# Altium PCB ARS_CR_LedStripModule_Rev1B.PcbDoc
Units mm, origin at the board's own origin, x right, y up, seen from the top; angles counter-clockwise.
Board outline 55 x 70 mm, 4 copper layers (Top Layer, Int1 (GND), Int2 (PWR), Bottom Layer), stack 1.369 mm thick; 65 components, 42 nets, 227 pads, 109 vias.
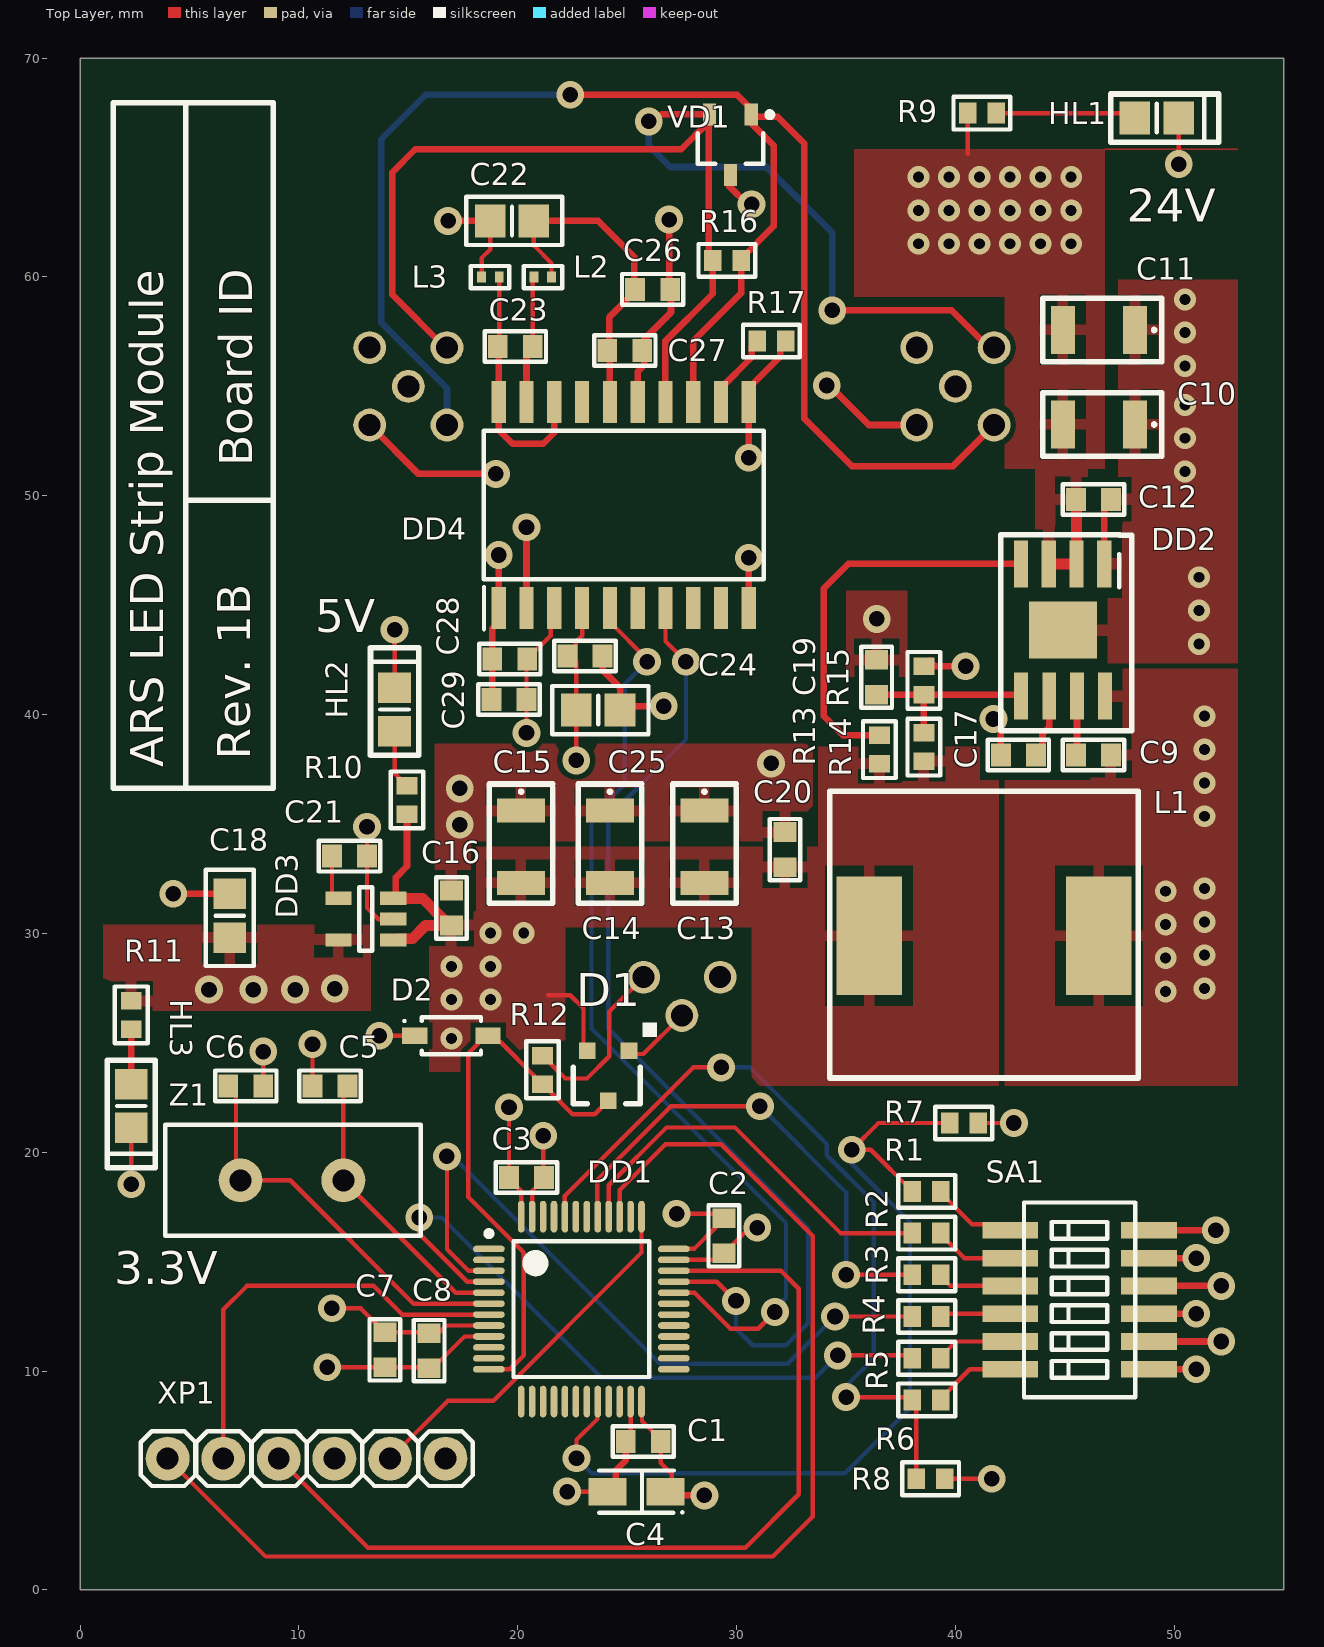
[diagram p0: Top Layer view]
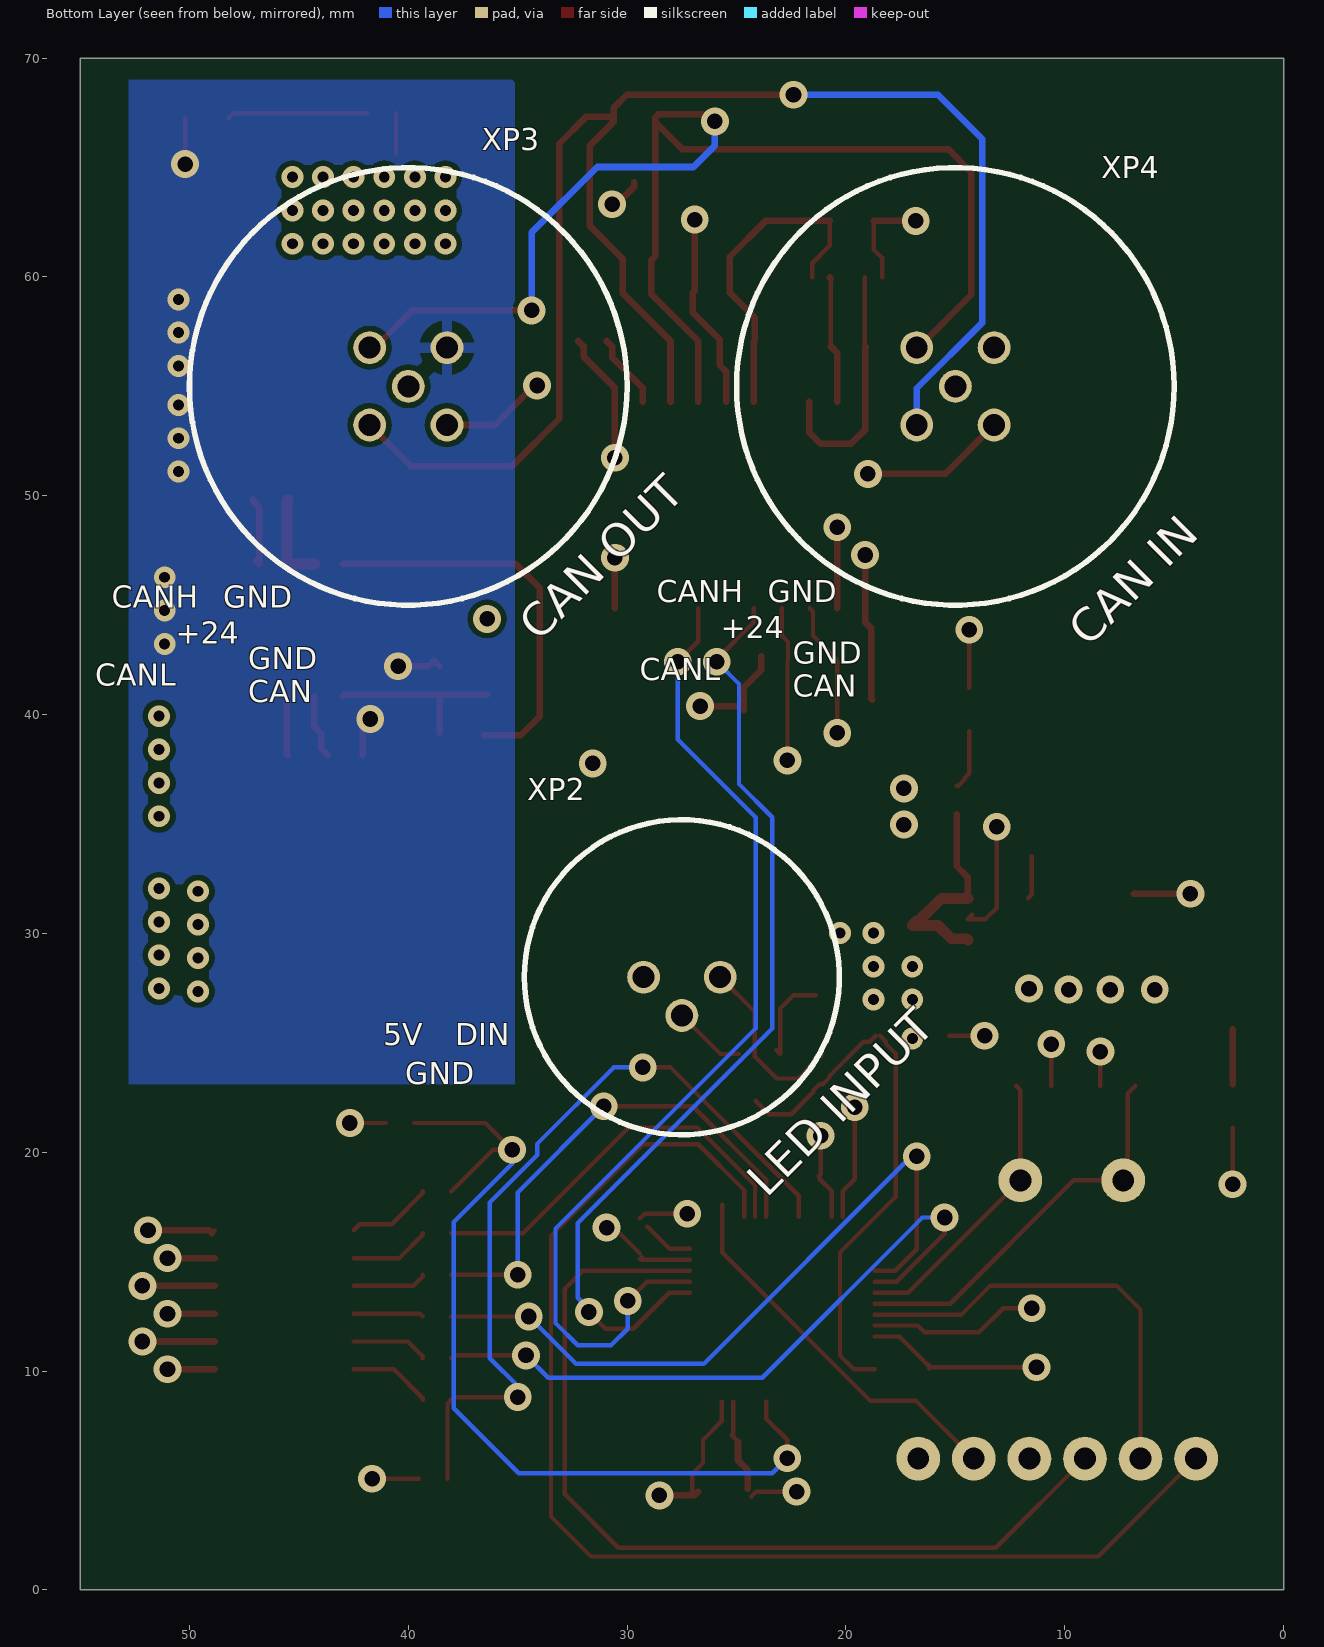
[diagram p1: Bottom Layer view, seen from below]
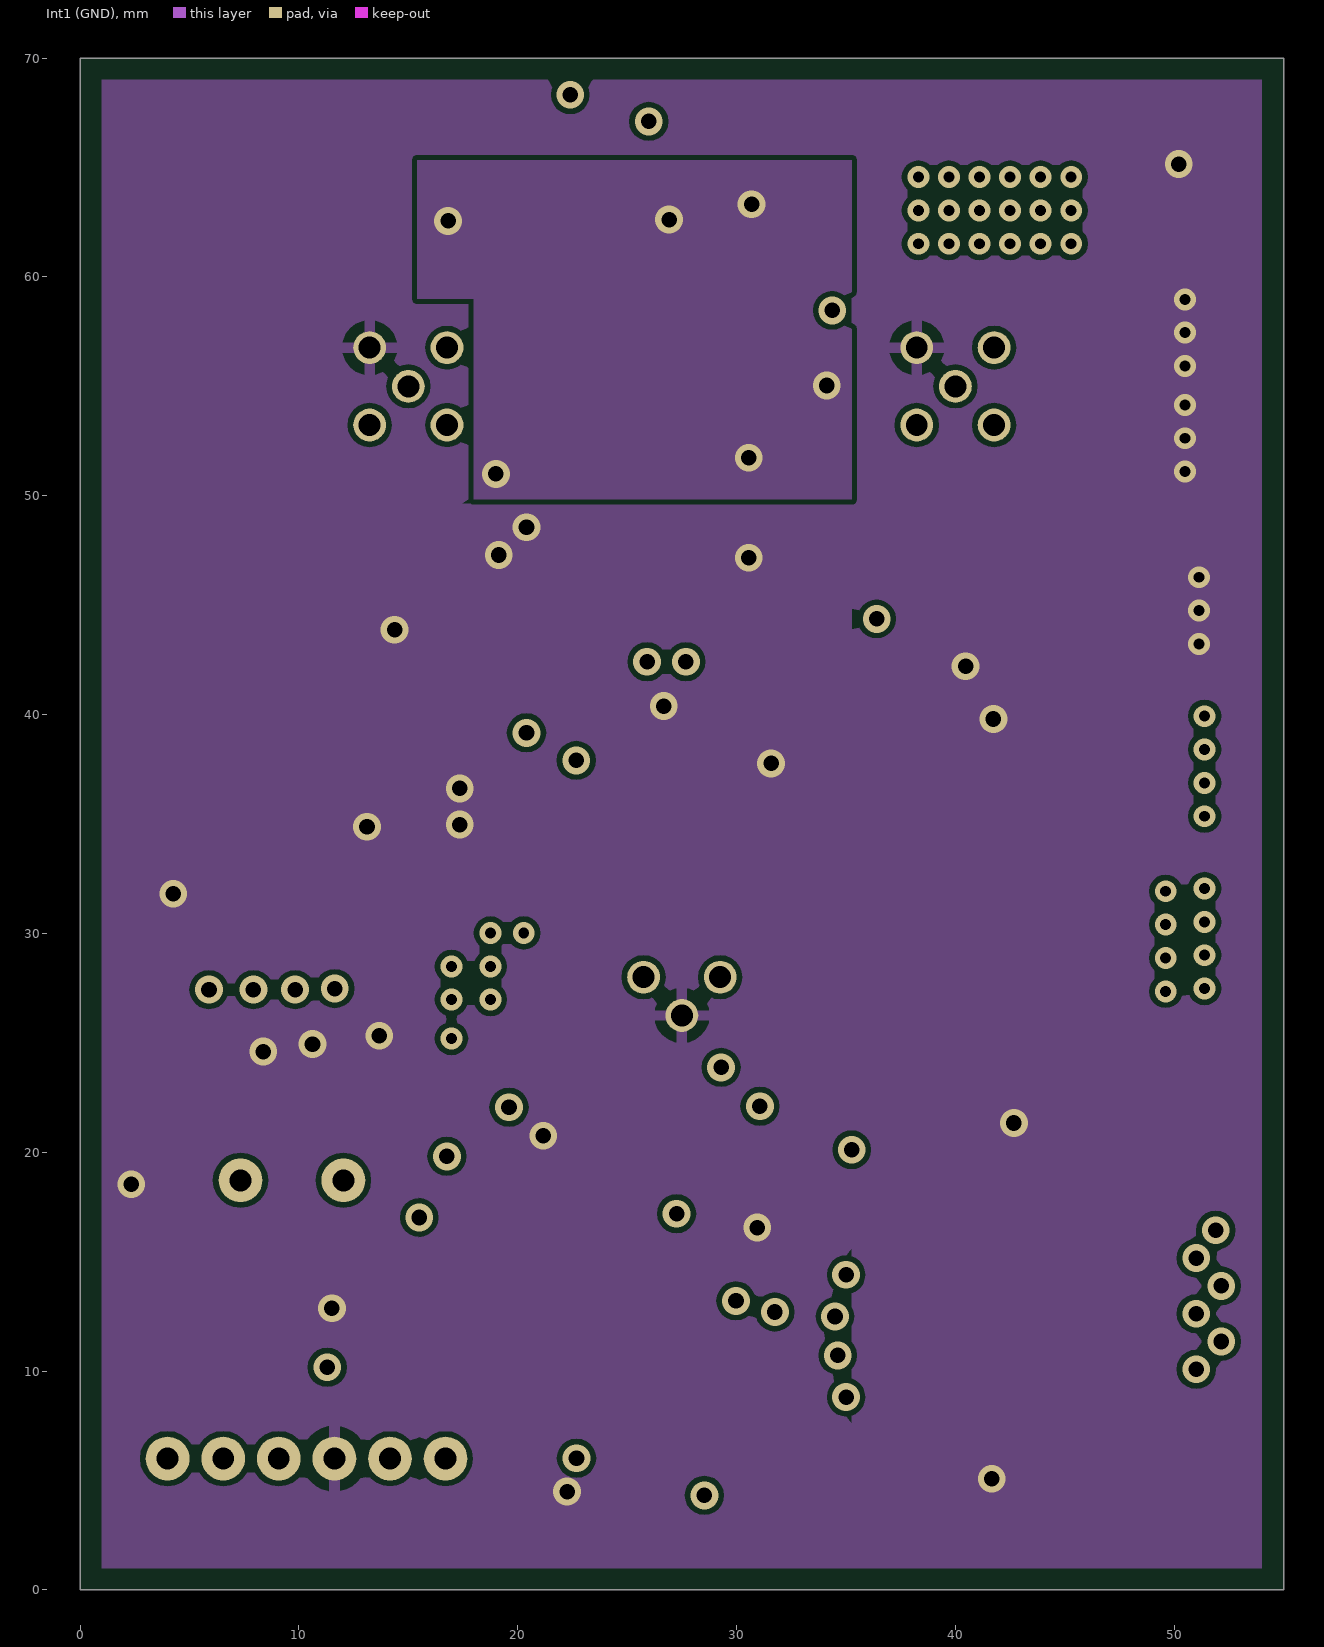
[diagram p2: Int1 (GND)]
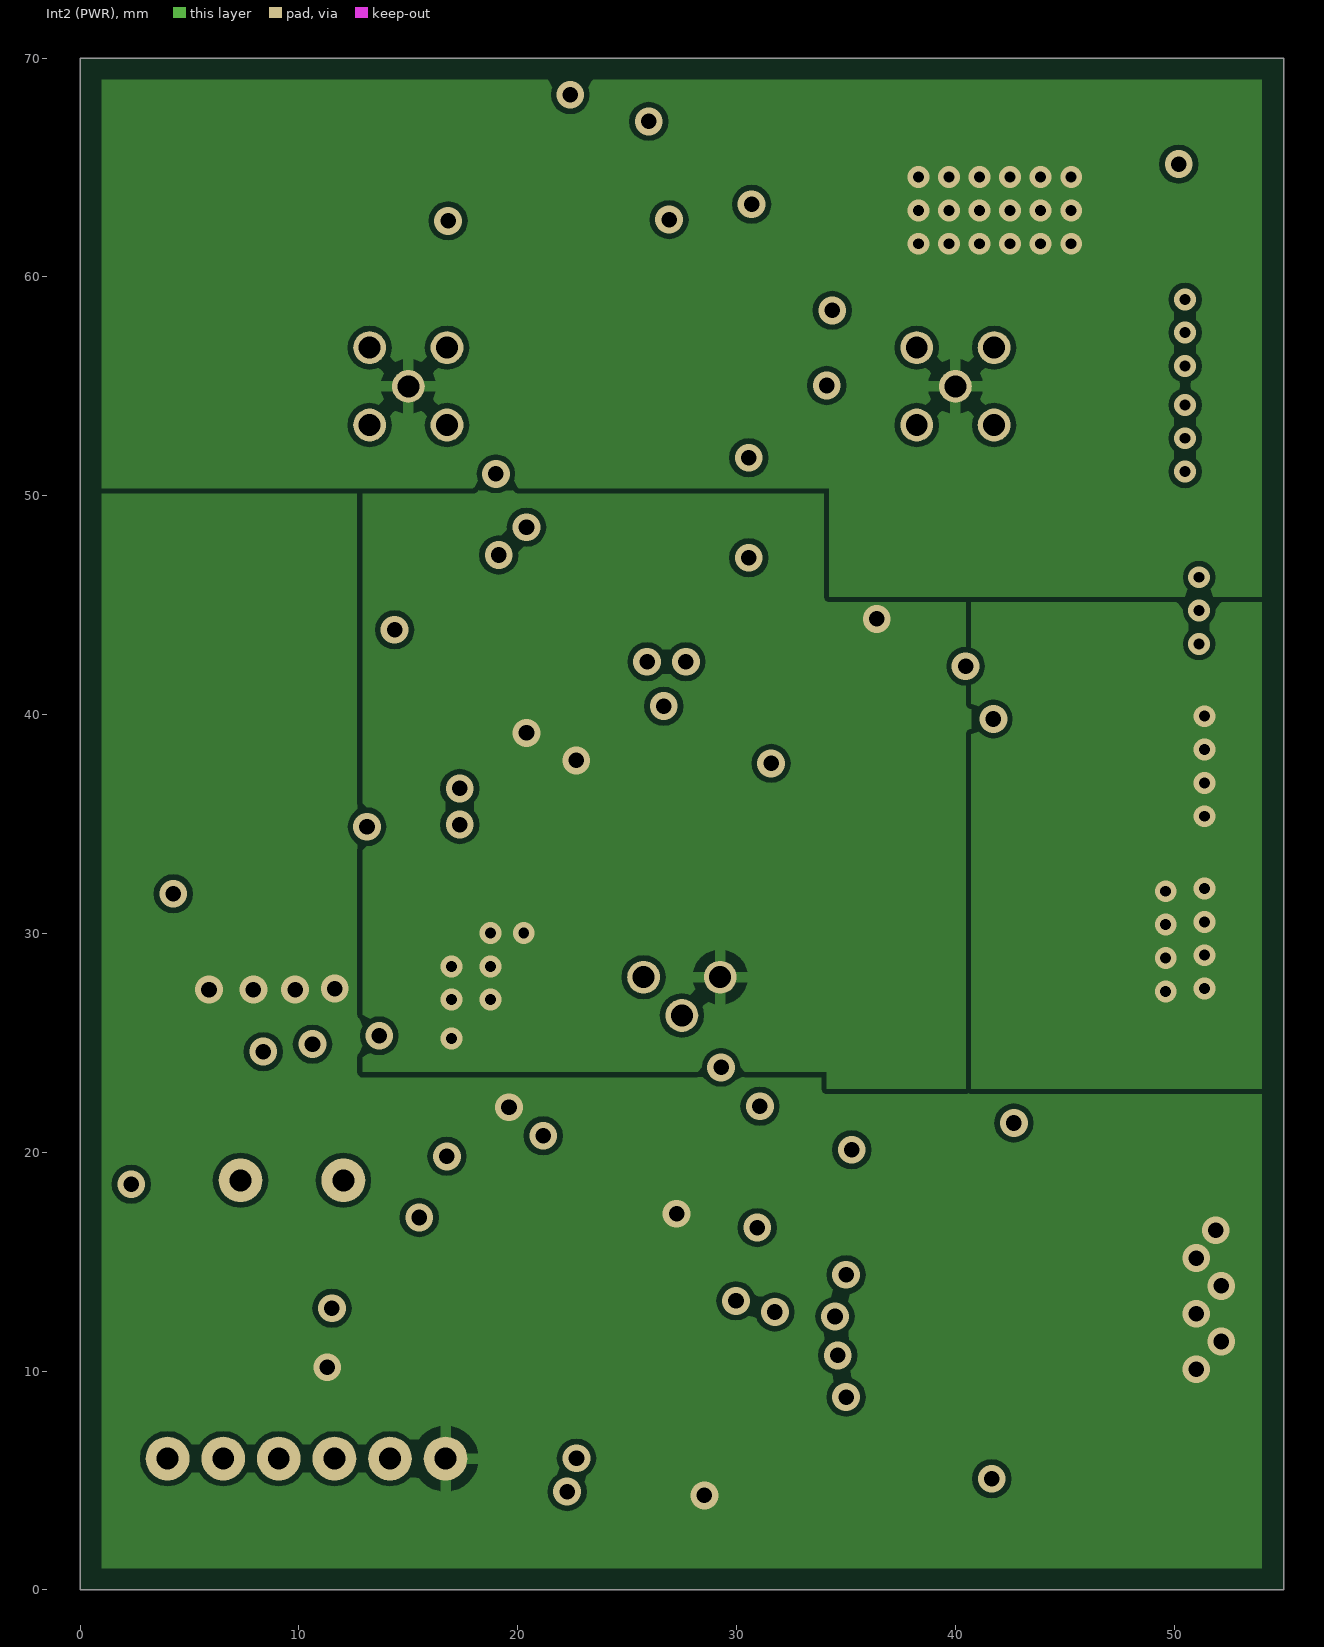
[diagram p3: Int2 (PWR)]

## Layer stack, top to bottom
Top Solder: solder mask 0.0254, SM-001, Dk 4
Top Layer: signal copper 0.035
Dielectric 1: prepreg 0.1295, PP-017, Dk 4.3
Dielectric 2: prepreg 0.1295, PP-017, Dk 4.3
Int1 (GND): signal copper 0.035
Dielectric 3: core 0.7112, Core-039, Dk 4.8
Int2 (PWR): signal copper 0.035
Dielectric 4: prepreg 0.1295, PP-017, Dk 4.3
Dielectric 5: prepreg 0.1295, PP-017, Dk 4.3
Bottom Layer: signal copper 0.035
Bottom Solder: solder mask 0.0254, SM-001, Dk 4

## Board outline
0,0 0,70 55,70 55,0

## Design rules (kind name [scope] priority, off if disabled: settings)
AssemblyTestpoint [All] p1: testpointundercomponent=TRUE minsize=1.016 maxsize=2.54 preferedsize=1.524 minholesize=0 maxholesize=1.016 preferedholesize=0.813 testpointgrid=0.025 usegrid=TRUE gridtolerance=0
Clearance Clearance_vias [IsVia vs IsVia] p1: gap=0.2 ignorepadtopadclearanceinfootprint=FALSE
Clearance Clearance_non_plated [All vs (HoleDiameter > 0) And (PadIsPlated = 'False')] p2: gap=0.275 ignorepadtopadclearanceinfootprint=FALSE
Clearance [All] p3: gap=0.2 ignorepadtopadclearanceinfootprint=FALSE except(0.25: Arc-Fill Arc-Poly Arc-Region Track-Fill Track-Poly Track-Region SMDPad-Fill SMDPad-Poly SMDPad-Region THPad-Fill THPad-Poly THPad-Region Via-Fill Via-Poly Via-Region Fill-Fill Fill-Poly Fill-Region Poly-Poly Poly-Region Region-Region)
DiffPairsRouting [All] p1: maxlimit=0.3 minlimit=0.2 mostfreqgap=0.25 toplayer_minwidth=0.2 toplayer_maxwidth=1 toplayer_prefwidth=0.25 midlayer1_minwidth=0.2 midlayer1_maxwidth=1 midlayer1_prefwidth=0.25 midlayer2_minwidth=0.2 midlayer2_maxwidth=1 midlayer2_prefwidth=0.25 bottomlayer_minwidth=0.2 bottomlayer_maxwidth=1 bottomlayer_prefwidth=0.25 maxuncoupledlength=12.7
HoleSize [All] p1: absolutevalues=TRUE maxlimit=7 minlimit=0.5 maxpercent=80.000 minpercent=20.000
MinimumAnnularRing [All] p1: minimumring=0.25
NetAntennae .VvAkaF7oee6ctAcTlM4a4T.kGzK.duQ9Ug6WwFj&{c6Uxp.fI()n,r0~ [All] p1: netantennaetolerance=0
PolygonConnect PolygonConnectVIA [IsVia] p1: connectstyle=Direct reliefconductorwidth=0.254 reliefentries=4 polygonreliefangle="90 Angle" airgapwidth=0.254
PolygonConnect PolygonConnectPAD [All] p2: connectstyle=Relief reliefconductorwidth=0.5 reliefentries=4 polygonreliefangle="90 Angle" airgapwidth=0.5
RoutingVias [All] p1: holewidth=0.5 width=1 viastyle="Through Hole" minholewidth=0.5 minwidth=1 maxholewidth=3 maxwidth=4
SilkToSilkClearance [All] p1: silktosilkclearance=0.25
SolderMaskExpansion SolderMaskExpansion_non_plated [(HoleDiameter > 0) And (PadIsPlated = 'False')] p1: expansion=0.05 istentingtop=FALSE soldermaskfromhole=TRUE
SolderMaskExpansion SolderMaskExpansion_VIAs [IsVia] p2: expansion=0.25 istentingtop=TRUE soldermaskfromhole=TRUE
SolderMaskExpansion [All] p3: expansion=0.05 istentingtop=FALSE
UnRoutedNet [All] p1: checkbadconnections=TRUE
UnpouredPolygon 2.?a7K2MMp}0~ [All] p1:
Width signal [All] p1: maxlimit=5 minlimit=0.2 preferedwidth=0.3
23 further rules are at their usual default settings.

## Classes and differential pairs
component class U_sub_can: C22 C23 C24 C25 C26 C27 C28 C29 DD4 L2 L3 R16 R17 VD1 XP3 XP4
component class ARS_CR_LedStripModule_Rev1B: C1 C2 C3 C4 C5 C6 C7 C8 C9 C10 C11 C12 C13 C14 C15 C16 C17 C18 C19 C20 C21 D1 D2 DD1 DD2 DD3 HL1 HL2 HL3 L1 R1 R2 R3 R4 R5 R6 R7 R8 R9 R10 R11 R12 R13 R14 R15 SA1 XP1 XP2 Z1

## Components (designator, comment, footprint, x,y, rotation, side; value= is the part's Value field where it differs from the comment)
C1 "Capacitor" 0603C 25.734,6.78 r0 top value=0,1мкФ
C2 "Capacitor" 0603C 29.417,16.178 r90 top value=0,1мкФ
C3 "Capacitor" 0603C 20.4,18.845 r180 top value=0,1мкФ
C4 "1uF" "TC_A (3216)" 25.425,4.494 r180 top value=4,7мкФ
C5 "Capacitor" 0603C 11.421,23.036 r0 top value=16пФ
C6 "Capacitor" 0603C 7.573,23.036 r180 top value=16пФ
C7 "Capacitor" 0603C 13.923,10.971 r270 top value=1мкФ
C8 "Capacitor" 0603C 15.955,10.933 r270 top value=10нФ
C9 "Capacitor" 0603C 46.308,38.149 r180 top value=0,1мкФ
C10 "Capacitor" 1210C 46.563,53.262 r180 top value=10мкФ
C11 "Capacitor" 1210C 46.562,57.58 r180 top value=10мкФ
C12 "Capacitor" 0603C 46.308,49.833 r180 top value=0,22мкФ
C13 "Capacitor" 1210C 28.528,33.958 r270 top value=47мкФ
C14 "Capacitor" 1210C 24.21,33.958 r270 top value=47мкФ
C15 "Capacitor" 1210C 20.146,33.958 r270 top value=47мкФ
C16 "Capacitor" 0603C 16.971,31.164 r270 top value=0,1мкФ
C17 "Capacitor" 0603C 42.879,38.149 r0 top value=1мкФ
C18 "Capacitor" 0805C 6.938,30.91 r270 top value=10мкФ
C19 "Capacitor" 0603C 36.402,41.705 r90 top value=8,2пФ
C20 "Capacitor" 0603C 32.211,33.831 r270 top value=0,1мкФ
C21 "Capacitor" 0603C 12.31,33.528 r180 top value=10нФ
C22 "Capacitor" 0805C 19.638,62.66 r0 top value=10мкФ
C23 "Capacitor" 0603C 19.892,56.818 r0 top value=0,22мкФ
C24 "Capacitor" 0603C 23.076,42.672 r0 top value=0,1мкФ
C25 "Capacitor" 0805C 23.575,40.308 r0 top value=10мкФ
C26 "Capacitor" 0603C 26.162,59.436 r180 top value=0,1мкФ
C27 "Capacitor" 0603C 24.892,56.642 r180 top value=10нФ
C28 "Capacitor" 0603C 19.638,42.542 r0 top value=10нФ
C29 "Capacitor" 0603C 19.6,40.689 r0 top value=0,1мкФ
D1 "NUP1301, 215" SOT23 25.082,24.638 r270 top
D2 "Zener_Diode" SOD-123FL 16.971,25.322 r0 top value=MMSZ5231B
DD1 "STM32F103C8T6" LQFP48 22.906,12.832 r0 top
DD2 "LMR33640ADDAR" SOIC-9N 44.911,43.864 r270 top value="3,8... 36В"
DD3 "TPS73633DBVT" SOT23-5L 13.056,30.656 r180 top value=5В
DD4 "ADM3057EBRWZ" SOIC-20N 24.845,49.579 r90 top
HL1 "SMD Желтый" 0805D 49.102,67.359 r0 top
HL2 "SMD Зеленый" 0805D 14.272,40.132 r90 top
HL3 "SMD Синий" 0805D 2.434,22.214 r270 top
L1 "Inductance" induct_12,3x12,3x8 41.355,29.894 r180 top value=15мкГн
L2 "Inductance" 0402 21.143,59.993 r180 top value=Феррит
L3 "Inductance" 0402 18.749,59.993 r0 top value=Феррит
R1 "Resistor" 0603R 38.688,18.21 r0 top value=150Ом
R2 "Resistor" 0603R 38.688,16.305 r0 top value=150Ом
R3 "Resistor" 0603R 38.688,14.4 r0 top value=150Ом
R4 "Resistor" 0603R 38.688,12.495 r0 top value=150Ом
R5 "Resistor" 0603R 38.688,10.59 r0 top value=150Ом
R6 "Resistor" 0603R 38.688,8.685 r0 top value=150Ом
R7 "Resistor" 0603R 40.386,21.336 r180 top value=1кОм
R8 "Resistor" 0603R 38.862,5.08 r180 top value=1кОм
R9 "Resistor" 0603R 41.213,67.486 r180 top value=10кОм
R10 "Resistor" 0603R 14.939,36.102 r270 top value=1кОм
R11 "Resistor" 0603R 2.334,26.274 r90 top value=1кОм
R12 "Resistor" 0603R 21.13,23.764 r270 top value=1кОм
R13 "Resistor" 0603R 36.529,38.403 r270 top value=100кОм
R14 "Resistor" 0603R 38.561,38.515 r270 top value=100кОм
R15 "Resistor" 0603R 38.561,41.563 r270 top value=24,9кОм
R16 "Resistor" 0603R 29.559,60.755 r180 top value=120Ом
R17 "Resistor" 0603R 31.591,57.072 r180 top value=10кОм
SA1 "DIP_6PIN" SW-6 42.498,16.432 r270 top value=SMD
VD1 "ESDCAN24-2BLY" SOT23-3L 29.718,66.04 r270 top
XP1 "6_PIN_XP" PLS6 16.7,6 r270 top value=PLS-6
XP2 "3_PIN_XP" M8_ACODE_3PIN_FM_STR 27.5,28 r180 bottom value="M8 3PIN ACODE FM STR"
XP3 "5_PIN_XP" M12_ACODE_5PIN_FM_STR 40,55 r180 bottom value="M12 5PIN ACODE FM STR"
XP4 "5_PIN_XP" M12_ACODE_5PIN_FM_STR 15,55 r180 bottom value="M12 5PIN ACODE FM STR"
Z1 "XTAL" HC49US 9.732,18.718 r0 top value=8MHz

## Footprints (in the part's own frame and the unit in brackets; to place one, negate y for a bottom-side part, rotate by r counter-clockwise, add the part's x,y. Pads: shape width x height; smd on the part's side, far side on the other; paste and mask are expansions set on the pad)
0402 [mm]
  rect 0.4x0.5 smd: 1(-0.4,0) 2(0.4,0)
  silkscreen extent -0.89,-0.51 0.86,0.51, body extent -0.56,-0.25 0.56,0.25, height 0.65
0603C [mm] "Chip Resistor, 2-Leads, Body 1,40x0,80mm, IPC Medium Density"
  rect 0.9x1.05 smd: 1(-0.8,0) 2(0.8,0)
  silkscreen extent -1.4,-0.7 1.4,0.7, body extent -0.85,-0.45 0.85,0.45, height 0.9
0603R [mm] "Chip Resistor, 2-Leads, Body 1.60x0.85mm, IPC Medium Density"
  rect 0.8x0.95 smd: 1(-0.65,0) 2(0.65,0)
  silkscreen extent -1.3,-0.75 1.3,0.75, body extent -0.87,-0.47 0.88,0.48, height 0.9
0805C [mm]
  rect 1.4x1.5 smd: 1(-0.9,-0.1) 2(1.1,-0.1)
  silkscreen extent -2,-1.2 2.4,1, body extent -0.95,-0.8 1.15,0.55, height 0.67
0805D [mm]
  rect 1.4x1.5 smd: 1(-0.9,-0.1) 2(1.1,-0.1)
  silkscreen extent -2,-1.2 2.93,1, body extent -0.97,-0.8 1.17,0.6, height 0.7
1210C [mm]
  rect 1.1x2.2 smd: 1(-1.65,0) 2(1.65,0)
  silkscreen extent -2.87,-1.45 2.57,1.46, body extent -1.25,-1.25 1.25,1.25, height 3.2
HC49US [mm]
  round 2 hole 1: 1(-2.4,0) 2(2.3,0)
  silkscreen extent -5.84,-2.54 5.84,2.54, body extent -5.68,-2.25 5.67,2.4, height 3.5
induct_12,3x12,3x8 [mm]
  rect 3x5.4 smd: 1(-5.2,0) 2(5.3,0)
  silkscreen extent -7,-6.6 7.1,6.5, body extent -6,-6 6,6, height 8
LQFP48 [mm] "TSQFP, 48-Leads, Body 7,00x7,00mm, Pitch 0,50mm, IPC Medium Density"
  oval 1.45x0.3 smd: 1(-4.225,2.75) 2(-4.225,2.25) 3(-4.225,1.75) 4(-4.225,1.25) 5(-4.225,0.75) 6(-4.225,0.25) 7(-4.225,-0.25) 8(-4.225,-0.75) 9(-4.225,-1.25) 10(-4.225,-1.75) 11(-4.225,-2.25) 12(-4.225,-2.75) 25(4.225,-2.75) 26(4.225,-2.25) 27(4.225,-1.75) 28(4.225,-1.25) 29(4.225,-0.75) 30(4.225,-0.25) 31(4.225,0.25) 32(4.225,0.75) 33(4.225,1.25) 34(4.225,1.75) 35(4.225,2.25) 36(4.225,2.75)
  oval 0.3x1.45 smd: 13(-2.75,-4.225) 14(-2.25,-4.225) 15(-1.75,-4.225) 16(-1.25,-4.225) 17(-0.75,-4.225) 18(-0.25,-4.225) 19(0.25,-4.225) 20(0.75,-4.225) 21(1.25,-4.225) 22(1.75,-4.225) 23(2.25,-4.225) 24(2.75,-4.225) 37(2.75,4.225) 38(2.25,4.225) 39(1.75,4.225) 40(1.25,4.225) 41(0.75,4.225) 42(0.25,4.225) 43(-0.25,4.225) 44(-0.75,4.225) 45(-1.25,4.225) 46(-1.75,4.225) 47(-2.25,4.225) 48(-2.75,4.225)
  silkscreen extent -4.35,-3.1 3.1,3.57, body extent -4.5,-4.5 4.5,4.5, height 1.6
M8_ACODE_3PIN_FM_STR [mm]
  round 1.5 hole 1: 1(-1.75,0) 2(1.75,0) 3(0,-1.75)
  silkscreen extent -7.2,-7.2 7.2,7.2, body extent -6.5,-7.2 6.5,7.2, height 18.5
M12_ACODE_5PIN_FM_STR [mm]
  round 1.5 hole 1: 1(0,0) 2(1.768,1.768) 3(-1.768,1.768) 4(-1.768,-1.768) 5(1.768,-1.768)
  silkscreen extent -10,-10 10,10, body extent -13.72,-13.72 13.72,13.72, height 22.6
PLS6 [mm]
  round 2 hole 1: 1(0,0) 2(0,-2.54) 3(0,-5.08) 4(0,-7.62) 5(0,-10.16) 6(0,-12.7)
  silkscreen extent -1.25,-13.93 1.25,1.25, body extent -1.27,-13.97 1.27,1.27, height 8.44
SOD-123FL [mm]
  rect 1.15x0.75 smd: 1(-1.675,0) 2(1.675,0)
  silkscreen extent -2.2,-0.85 1.35,0.85, body extent -1.9,-0.85 1.9,0.85, height 1.2
SOIC-9N [mm]
  rect 2.15x0.65 smd: 1(-3.022,1.895) 2(-3.022,0.625) 3(-3.022,-0.645) 4(-3.022,-1.915) 5(3.02,-1.91) 7(3.022,0.645) 8(3.02,1.92)
  rect 2.15x0.6 smd: 6(3.02,-0.62)
  rect 2.6x3.1 smd: 9(0,0)
  silkscreen extent -4.36,-2.83 4.6,3.14, body extent -3,-2.45 3,2.45, height 1.7
SOIC-20N [mm]
  rect 1.925x0.65 smd: 1(-4.712,5.715) 2(-4.712,4.445) 3(-4.712,3.175) 4(-4.712,1.905) 5(-4.712,0.635) 6(-4.712,-0.635) 7(-4.712,-1.905) 8(-4.712,-3.175) 9(-4.712,-4.445) 10(-4.712,-5.715) 11(4.712,-5.715) 12(4.712,-4.445) 13(4.712,-3.175) 14(4.712,-1.905) 15(4.712,-0.635) 16(4.712,0.635) 17(4.712,1.905) 18(4.712,3.175) 19(4.712,4.445) 20(4.712,5.715)
  silkscreen extent -5.68,-6.4 3.4,6.4, body extent -5.16,-6.4 5.16,6.4, height 2.65
SOT23 [mil]
  rect 30x30 smd: 1(0,0) 2(0,-75) 3(90,-37.5)
  silkscreen extent -50,-100 95,50, body extent -4,-97 94,21, height 41
SOT23-3L [mm]
  rect 1x0.6 smd: 1(-1.375,0.95) 2(-1.375,-0.95) 3(1.375,0)
  silkscreen extent -1.5,-1.5 0.87,1.93, body extent -1.5,-1.52 1.5,1.52, height 1.25
SOT23-5L [mm]
  rect 1.2x0.6 smd: 1(-1.25,0.95) 2(-1.25,0) 3(-1.25,-0.95) 4(1.25,-0.95) 5(1.25,0.95)
  silkscreen extent -0.3,-1.45 0.3,1.45, body extent -1.4,-1.45 1.4,1.45, height 1.45
SW-6 [mil]
  rect 30x100 smd: 1(0,0) 2(50,0) 3(100,0) 4(150,0) 5(200,0) 6(250,0) 7(250,250) 8(200,250) 9(150,250) 10(100,250) 11(50,250) 12(0,250)
  silkscreen extent -50,25 300,225, body extent -52,-13 302,251, height 91
"TC_A (3216)" [mm] "Tantalum capacitor, type A,  1 pin - plus"
  rect 1.75x1.25 smd: 1(-1.325,0) 2(1.325,0)
  silkscreen extent -2.15,-0.97 1.7,1, body extent -1.73,-0.8 1.73,0.8, height 1.64

## Part data
C1 C2 C3 C9 C16 C20 C24 C26 C29: library part 06035C104KAT2A, Package=0603, Tolerance=10%, Parameter=50В, Part Name=06035C104KAT2A, Shop Link=https://www.terraelectronica.ru/product/577475, Type=Керамический
C4: library part "TECAP4.7/20VA, 10%", Package="ТС_А (3216)", Tolerance=10%, Parameter=20В, Part Name="TECAP4.7/20VA, 10%", Shop Link=https://www.terraelectronica.ru/product/874947, Type=Танталовый
C5 C6: library part CC0603JRNPO9BN160, Package=0603, Tolerance=5%, Parameter=50В, Part Name=CC0603JRNPO9BN160, Shop Link=https://www.terraelectronica.ru/product/854177, Type=Керамический
C7 C17: library part GRM188R71E105KA12D, Package=0603, Tolerance=10%, Parameter=25В, Part Name=GRM188R71E105KA12D, Shop Link=https://www.terraelectronica.ru/product/351169, Type=Керамический
C8 C21 C27 C28: library part GRM188R72A103KA01D, Package=0603, Tolerance=10%, Parameter=100В, Part Name=GRM188R72A103KA01D, Shop Link=https://www.terraelectronica.ru/product/1066366, Type=Керамический
C10 C11: library part C3225X7R1H106M250AC, Package=1210, Tolerance=20%, Parameter=50В, Part Name=C3225X7R1H106M250AC, Shop Link=https://www.terraelectronica.ru/product/2085017, Type=Керамический
C12 C23: library part CC0603JRX7R6BB224, Package=0603, Tolerance=5%, Parameter=10В, Part Name=CC0603JRX7R6BB224, Shop Link=https://www.terraelectronica.ru/product/882662, Type=Керамический
C13 C14 C15: library part GRM32ER61C476KE15L, Package=1210, Tolerance=10%, Parameter=16В, Part Name=GRM32ER61C476KE15L, Shop Link=https://www.terraelectronica.ru/product/577695, Type=Керамический
C18 C22 C25: library part GRM21BR61C106KE15L, Package=0805, Tolerance=10%, Parameter=16В, Part Name=GRM21BR61C106KE15L, Shop Link=https://www.terraelectronica.ru/product/566229, Type=Керамический
C19: library part CC0603CRNPO9BN8R2, Package=0603, Tolerance=3%, Parameter=50В, Part Name=CC0603CRNPO9BN8R2, Shop Link=https://www.terraelectronica.ru/product/568653, Type=Керамический
D1: library part NUP1301,215, "TVS", Package=SOT-23, Part Name=NUP1301,215, Shop Link=https://www.terraelectronica.ru/product/1917476, Type=Защитный
D2: library part MMSZ5231B, Package=SOD-123, Parameter=5В, Part Name=MMSZ5231B, Shop Link=https://elbase.ru/products/view/MMSZ5231B/, Type=Стабилитрон
DD1: "STM 32-bit MCU", Manufacturer Status=Production, Package=LQFP48, ComponentLink1Description="New link", Designer Status="Tested and Approved", Max Supply Days=11, Min Supply Days=11, New=N, Part Name=STM32F103C8T6, PartNumber=STM32F103C8T6, Price=1385,72, Shop Link=https://www.terraelectronica.ru/product/269447, Supplier=Терраэлектроника, Type=Микроконтроллер
DD2: Package=SOIC-9N, Parameter="1... 24В ; 4А", Part Name=LMR33640ADDAR, Shop Link=https://www.elitan.ru/price/item22698913, Type="Импульсный регулятор"
DD3: Package=SOT223, Parameter="3,3В ; 0,4А", Part Name=TPS73633DBVT, Shop Link=https://www.terraelectronica.ru/product/215389, Type="Линейный регулятор"
DD4: "CAN", Package=SOIC-20, Parameter="1,7... 5,5В", Part Name=ADM3057EBRWZ, Shop Link=https://www.elitan.ru/price/item20186299, Type="Изолированный приемопередатчик"
HL1: library part FYLS-0805YC, "Желтый", Package=0805, Part Name=FYLS-0805YC, Shop Link=https://www.elitan.ru/price/item12825588, Type=Светодиод
HL2: library part FYLS-0805PGC, "Зеленый", Package=0805, Part Name=FYLS-0805PGC, Shop Link=https://www.terraelectronica.ru/product/600968, Type=Светодиод
HL3: library part TO-2013BC-BF, "Синий", Package=0805, Part Name=TO-2013BC-BF, Shop Link=https://www.elitan.ru/price/item19520836, Type=Светодиод
L1: library part CDRH127/LDNP-150MC, Package=12.3x12.3, Tolerance=20%, Parameter=5,65А, Part Name=CDRH127/LDNP-150MC, Shop Link=https://www.terraelectronica.ru/product/231350, Type=Индуктивность
L2 L3: library part BLM15HD182SN1D, Package=0402, Parameter=1,8кОм, Part Name=BLM15HD182SN1D, Shop Link=https://www.terraelectronica.ru/product/557145, Type="Ферритовая бусина"
R1 R2 R3 R4 R5 R6: library part RC0603FR-07150RL, Package=0603R, Tolerance=1%, Part Name=RC0603FR-07150RL, Shop Link=https://www.terraelectronica.ru/product/823167, Type=Resistor
R7 R8 R10 R11 R12: library part RC0603JR-071KL, Package=0603R, Tolerance=5%, Part Name=RC0603JR-071KL, Shop Link=https://www.terraelectronica.ru/product/555273, Type=Resistor
R9 R17: library part RC0603JR-0710KL, Package=0603R, Tolerance=5%, Part Name=RC0603JR-0710KL, Shop Link=https://www.terraelectronica.ru/product/562124, Type=Resistor
R13 R14: library part RC0603FR-07100KL, Package=0603R, Tolerance=1%, Part Name=RC0603FR-07100KL, Shop Link=https://www.elitan.ru/price/item617400, Type=Resistor
R15: library part RC0603FR-0724K9L, Package=0603R, Tolerance=1%, Part Name=RC0603FR-0724K9L, Shop Link=https://www.terraelectronica.ru/product/561077, Type=Resistor
R16: library part RC0603JR-07120RL, Package=0603R, Tolerance=5%, Part Name=RC0603JR-07120RL, Shop Link=https://www.terraelectronica.ru/product/328415, Type=Resistor
SA1: library part DHN-06-T-V, "SMD", Parameter=xxx, Part Name=DHN-06-T-V, Shop Link=https://www.chipdip.ru/product0/8004287333, Type="DIP переключатель"
VD1: "TVS", Package=SOT-23-3L, Parameter="40В ; 5,5А", Part Name=ESDCAN24-2BLY, Shop Link=https://www.terraelectronica.ru/product/1048813, Type=Защитный
XP1: library part PLS-6, "Male", Value1="SWD VCC", Value2="SWD TCK", Value3="SWD GND", Value4="SWD TMS", Value5="SWD NRST", Value6="SWD SWO", Part Name=PLS-6, Shop Link=https://www.terraelectronica.ru/product/2259227, Type=Разъем
XP2: library part 8B003, "A code ; Female ; Front mount", Package=M8, Tolerance=straight, Value1="5В Лента", Value2=DIN, Value3="Общ. Внеш.", Parameter="Front mount", Part Name=8B003, Type=Разъем
XP3 XP4: library part 12B011, "A code ; Female ; Front mount", Package=M12, Tolerance=straight, Value1=+24В, Value2="Общ. Внеш.", Value3=CANH, Value4=CANL, Value5="Общ. CAN", Parameter="Front mount", Part Name=12B011, Type=Разъем
Z1: library part "HC49US 8.000000MHz 16pF 30ppm", "Резонатор", Package=HC49US, Parameter=16пФ, Part Name="HC49US 8.000000MHz 16pF 30ppm", Shop Link=https://www.terraelectronica.ru/product/31625, Type=Резонатор

## Via types
v1: diameter 1.27, hole 0.711, Top Layer to Bottom Layer, tented both sides, 63 vias
v2: diameter 1, hole 0.5, Top Layer to Bottom Layer, tented both sides, 46 vias

## Nets (pads, with @x,y where several pads share a name; then routed paths per layer and width w, separated by ;. In a path a pad name is that pad's centre, name@x,y a point inside that pad or via, vN(x,y) a via of type N, cw(c..) or ccw(c..) an arc to the next point about the centre after c; other vN are vias at no path point)
+3,3МК: C1.2 C2.2 C3.2 C4.1 C7.2 C8.2 C18.2 DD1.9 DD1.24 DD1.36 DD1.48 DD3.5 R11.2 SA1.7 SA1.8 SA1.9 SA1.10 SA1.11 SA1.12 XP1.1 | length 40.7
  Top Layer w0.2: v1(11.294,10.171) C7.2 16.171,10.171 C8.2@16.209,10.133 ; C8.2@16.209,10.298 16.284,10.298 17.568,11.582 DD1.9 ; v1(19.6,22.058) C3.2 19.6,18.77 20.156,18.214 DD1.48 ; DD1.24 25.656,8.604 25.675,8.585 25.675,7.713 26.534,6.855 C1.2 26.534,5.8 27.033,5.301 27.033,4.522 C4.1@26.877,4.367 ; DD1.36 28.059,15.582 C2.2@29.074,16.597 ; v1(27.258,17.194) 29.201,17.194 C2.2 ; SA1.12 SA1.12@48.975,16.305
  Top Layer w0.3: C4.1 26.877,4.367 26.925,4.318 v1(28.528,4.318) ; SA1.7 v1(51.007,10.082) ; SA1.8 v1(52.15,11.352) ; SA1.9 v1(51.007,12.622) ; SA1.10 v1(52.15,13.892) ; SA1.11 v1(51.007,15.162) ; SA1.12@48.975,16.305 49.102,16.432 v1(51.896,16.432)
  other v1: 5.89,27.432 7.922,27.432 9.827,27.432 11.637,27.481
+5В: C13.2 C14.2 C15.2 C16.2 C19.2 C20.2 C24.1 C25.1 C28.2 C29.2 D1.2 DD3.1 DD3.3 DD4.3 DD4.4 L1.2 R10.2 R13.2 R14.2 XP2.1 | length 27.4
  Top Layer w0.2: v1(20.4,39.165) C29.2 20.4,42.429 20.438,42.467 C28.2 21.506,43.61 21.506,44.703 DD4.3 ; 21.384,27.178 22.4,27.178 23.006,26.572 23.006,24.489 D1.2@23.184,24.667 ; v1(22.675,37.906) C25.1 22.675,42.44 22.648,42.467 22.648,43.318 22.94,43.61 DD4.4
  Top Layer w0.3: DD3.3@14.431,31.606 14.431,32.561 14.939,33.069 R10.2
  Top Layer w0.5: DD3.1@14.431,29.706 14.481,29.756 15.182,29.756 15.79,30.364 C16.2@16.896,30.364 ; DD3.3@14.431,31.606 15.64,31.606 16.682,30.564 16.771,30.564 C16.2
  other v1: 36.402,44.372
  other v2: 16.971,25.195 16.971,26.973 18.749,26.973 16.971,28.497 18.749,28.497 18.749,30.021 20.273,30.021
+24В: C10.2 C11.2 C12.2 DD2.2 DD2.3 R9.2 XP3.1 XP4.1 | length 6.1
  Top Layer w0.2: 40.563,65.629 R9.2
  Top Layer w0.5: DD2.3 DD2.2 45.536,49.805 C12.2
  other v2: 38.307,61.517 39.704,61.517 41.101,61.517 42.498,61.517 43.895,61.517 45.292,61.517 38.307,63.041 39.704,63.041 41.101,63.041 42.498,63.041 43.895,63.041 45.292,63.041 38.307,64.565 39.704,64.565 41.101,64.565 42.498,64.565 43.895,64.565 45.292,64.565
"Address 1": DD1.40 R2.1 | length 18.4
  Top Layer w0.2: DD1.40 24.156,18.488 26.799,21.131 29.925,21.131 34.751,16.305 R2.1
"Address 2": DD1.41 R3.1 | length 22.9
  Top Layer w0.2: DD1.41 23.637,17.076 23.637,18.731 27.004,22.098 v1(31.068,22.098) ; v1(35.005,14.4) R3.1
  Bottom Layer w0.2: v1(31.068,22.098) 35.005,18.161 v1(35.005,14.4)
"Address 3": DD1.3 R4.1 | length 32.7
  Top Layer w0.2: v1(16.764,19.812) 16.764,15.57 17.752,14.582 DD1.3 ; v1(34.497,12.495) R4.1
  Bottom Layer w0.2: v1(16.764,19.812) 17.018,19.812 26.494,10.336 32.338,10.336 v1(34.497,12.495)
BOOT0: DD1.44 R6.1 R8.2 | length 36.5
  Top Layer w0.2: DD1.44 22.156,18.012 28.02,23.876 v1(29.29,23.876) ; v1(35.005,8.812) 37.911,8.812 R6.1 38.212,8.51 R8.2
  Bottom Layer w0.2: v1(29.29,23.876) 30.612,23.876 34.116,20.372 34.116,19.864 36.275,17.705 36.275,10.59 35.005,9.32 v1(35.005,8.812)
BOOT1: DD1.20 R1.1 R7.2 | length 41.2
  Top Layer w0.2: v1(22.686,6.018) 22.686,6.858 23.64,7.812 23.64,8.59 DD1.20 ; R1.1 36.133,20.115 v1(35.259,20.115) 36.48,21.336 R7.2
  Bottom Layer w0.2: v1(22.686,6.018) 23.369,5.334 34.956,5.334 37.926,8.304 37.926,16.813 35.259,19.48 v1(35.259,20.115)
NetC5_2: C5.2 DD1.5 Z1.2 | length 13.4
  Top Layer w0.2: C5.2 12.032,22.847 Z1.2 12.399,18.718 12.399,18.337 12.413,18.337 17.168,13.582 DD1.5
NetC6_2: C6.2 DD1.6 Z1.1 | length 18.2
  Top Layer w0.2: C6.2 7.123,22.686 7.123,18.927 Z1.1 9.605,18.718 15.241,13.082 DD1.6
NetC9_1: C9.1 DD2.8 L1.1
  other v2: 49.61,27.354 51.388,27.481 49.61,28.878 51.388,29.005 49.61,30.402 51.388,30.529 49.61,31.926 51.388,32.053 51.388,35.355 51.388,36.879 51.388,38.403 51.388,39.927
NetC9_2: C9.2 DD2.7 | length 2.7
  Top Layer w0.3: C9.2 45.556,38.197 DD2.7
NetC17_2: C17.2 DD2.6 | length 2.9
  Top Layer w0.3: C17.2 43.979,38.449 43.979,39.122 44.291,39.434 DD2.6
NetC19_1: C19.1 DD2.5 R14.1 R15.2 | length 8.4
  Top Layer w0.3: C19.1 36.41,40.913 R15.2 ; R14.1 R15.2 ; DD2.5 42.932,40.913 R15.2
NetC21_2: C21.2 DD3.4 | length 2
  Top Layer w0.2: C21.2 11.51,31.776 DD3.4@11.681,31.606
NetC22_2: C22.2 C26.2 C27.2 DD4.16 L2.1 | length 15.3
  Top Layer w0.2: C22.2 20.738,61.433 21.543,60.628 L2.1
  Top Layer w0.3: C22.2 23.675,62.56 25.315,60.92 25.315,59.358 25.315,59.283 24.172,58.14 24.172,57.072 24.21,57.034 DD4.16
NetC23_1: C23.1 DD4.18 DD4.20 L3.2 | length 11.4
  Top Layer w0.2: C23.1 19.149,56.875 L3.2
  Top Layer w0.3: C23.1 19.13,56.78 DD4.20 19.13,53.008 19.765,52.373 21.162,52.373 21.67,52.881 DD4.18
NetC23_2: C23.2 DD4.19 L2.2 | length 5.8
  Top Layer w0.2: C23.2 L2.2@20.692,59.892
  Top Layer w0.3: DD4.19 20.4,56.526 C23.2 ; L2.2@20.692,59.892 20.743,59.943 L2.2
NetD1_3: D1.3 D2.2 DD1.12 R12.2 | length 25.1
  Top Layer w0.2: D2.2@18.446,25.322 18.171,25.047 18.171,24.948 17.733,24.51 17.733,17.956 20.273,15.416 20.273,10.717 19.638,10.082 DD1.12 ; D2.2 18.921,25.047 19.197,25.047 20.755,23.489 20.755,23.414 21.055,23.114 R12.2 21.205,23.114 21.505,22.814 21.505,22.739 22.505,21.739 23.517,21.739 D1.3
NetDD1_32: DD1.32 DD4.5 | length 43.4
  Top Layer w0.2: DD4.5 24.21,44.229 25.908,42.531 v1(25.908,42.418) ; DD1.32 28.074,13.582 29.718,11.938 30.988,11.938 v1(31.75,12.7)
  Bottom Layer w0.2: v1(25.908,42.418) 24.892,41.402 24.892,36.83 23.368,35.306 23.368,25.654 32.258,16.764 32.258,13.349 31.75,12.841 v1(31.75,12.7)
NetDD1_33: DD1.33 DD4.7 | length 46.8
  Top Layer w0.2: DD4.7 26.75,43.354 v1(27.686,42.418) ; DD1.33 29.098,14.082 v1(29.972,13.208)
  Bottom Layer w0.2: v1(27.686,42.418) 27.686,38.862 24.13,35.306 24.13,25.654 33.274,16.51 33.274,12.192 32.258,11.176 30.734,11.176 29.972,11.938 v1(29.972,13.208)
NetDD2_4: DD2.4 R13.1 | length 18.2
  Top Layer w0.3: R13.1 34.863,39.053 33.989,39.927 33.989,45.769 35.106,46.886 DD2.4
NetDD4_12: DD4.12 R17.2 | length 3.5
  Top Layer w0.3: DD4.12 29.29,54.928 30.691,56.329 30.691,56.822 R17.2
NetDD4_13: DD4.13 R16.1 VD1.1 XP3.4 XP4.4 | length 73.6
  Top Layer w0.3: v1(22.4,68.326) 30.02,68.326 30.621,67.725 30.621,67.083 30.621,67.16 30.771,67.31 31.877,67.31 33.1,66.087 33.1,53.516 35.259,51.357 39.892,51.357 XP3.4 ; DD4.13 28.02,57.072 30.209,59.261 R16.1 30.209,60.83 31.703,62.324 31.703,66.001 VD1.1@30.687,67.017
  Bottom Layer w0.3: XP4.4 16.768,54.908 13.764,57.912 13.764,66.294 15.796,68.326 v1(22.4,68.326)
NetDD4_14: DD4.14 R16.2 VD1.2 XP3.3 XP4.3 | length 63.3
  Top Layer w0.3: XP4.3 16.686,56.768 14.272,59.182 14.272,64.787 15.32,65.835 27.473,65.835 VD1.2@28.721,67.083 ; v1(25.988,67.105) 26.25,67.105 26.578,67.433 28.571,67.433 28.721,67.283 VD1.2@28.721,67.083 ; DD4.14 26.75,57.072 28.909,59.231 R16.2 28.721,60.943 VD1.2@28.721,67.083 ; v1(34.37,58.469) 39.831,58.469 41.101,57.199
  Bottom Layer w0.3: v1(25.988,67.105) 25.988,66.008 26.972,65.024 31.37,65.024 34.37,62.025 v1(34.37,58.469)
NetHL1_1: HL1.1 R9.1 | length 6.4
  Top Layer w0.2: R9.1 47.975,67.486 HL1.1
NetHL2_1: HL2.1 R10.1 | length 2.8
  Top Layer w0.2: HL2.1 14.372,37.318 14.564,37.127 14.564,37.052 14.864,36.752 R10.1
NetHL3_1: HL3.1 R11.1 | length 2.5
  Top Layer w0.3: HL3.1 R11.1
NetR1_2: R1.2 SA1.1 | length 3.9
  Top Layer w0.2: R1.2 39.338,18.135 40.76,16.713 42.217,16.713 SA1.1
NetR2_2: R2.2 SA1.2 | length 3.7
  Top Layer w0.2: R2.2 39.338,16.23 40.406,15.162 SA1.2
NetR3_2: R3.2 SA1.3 | length 3.4
  Top Layer w0.2: R3.2 39.338,14.325 39.771,13.892 SA1.3
NetR4_2: R4.2 SA1.4 | length 3.2
  Top Layer w0.2: R4.2 39.465,12.622 SA1.4
NetR5_2: R5.2 SA1.5 | length 3.5
  Top Layer w0.2: R5.2 39.338,10.665 40.025,11.352 SA1.5
NetR6_2: R6.2 SA1.6 | length 3.8
  Top Layer w0.2: R6.2 39.338,8.76 40.66,10.082 SA1.6
NetR12_1: R12.1 XP2.2 | length 8.2
  Top Layer w0.2: R12.1 21.205,24.414 21.505,24.114 21.505,24.039 22.176,23.368 23.162,23.368 24.178,24.384 24.178,26.428 XP2.2
"SWD NRST": DD1.7 XP1.5 | length 19.9
  Top Layer w0.2: XP1.5 6.54,12.81 7.622,13.892 13.415,13.892 14.725,12.582 DD1.7
"SWD SWO": DD1.39 XP1.6 | length 57.6
  Top Layer w0.2: XP1.6 8.476,1.524 31.654,1.524 33.481,3.351 33.481,16.178 29.29,20.369 26.75,20.369 24.656,18.275 DD1.39
"SWD TCK": DD1.37 XP1.2 | length 17.6
  Top Layer w0.2: XP1.2 16.796,8.636 18.876,8.636 25.656,15.416 DD1.37 DD1.37@25.656,17.604
"SWD TMS": DD1.34 XP1.4 | length 41.9
  Top Layer w0.2: XP1.4 13.156,1.924 30.403,1.924 32.846,4.367 32.846,13.765 32.029,14.582 DD1.34
"User mode": DD1.4 R5.1 | length 30.9
  Top Layer w0.2: v1(15.494,17.018) 15.494,16.274 17.687,14.082 DD1.4 ; v1(34.624,10.717) 37.911,10.717 R5.1
  Bottom Layer w0.2: v1(15.494,17.018) 16.51,17.018 23.827,9.701 33.608,9.701 v1(34.624,10.717)
"Общ. CAN": C22.1 C26.1 C27.1 DD4.11 DD4.15 L3.1 R17.1 VD1.3 XP3.5 XP4.5 | length 32.8
  Top Layer w0.2: L3.1 18.349,60.863 18.738,61.252 C22.1
  Top Layer w0.3: XP4.5 15.464,51 v1(19,51) ; v1(16.817,62.56) C22.1 ; DD4.15 25.48,55.675 25.772,55.967 25.772,57.072 25.772,57.147 27.004,58.379 27.004,59.269 26.915,59.358 v1(26.915,62.622) ; VD1.3@29.671,64.333 29.671,64.133 30.487,63.317 v1(30.687,63.317) ; v1(30.56,51.738) DD4.11 30.56,54.928 31.991,56.359 31.991,56.822 R17.1 ; v1(34.116,55.04) 34.243,55.04 36.05,53.232 XP3.5
"Общ. Внеш.": C1.1 C2.1 C3.1 C4.2 C5.1 C6.1 C7.1 C8.1 C10.1 C11.1 C12.1 C13.1 C14.1 C15.1 C16.1 C17.1 C18.1 C20.1 C21.1 C24.2 C25.2 C28.1 C29.1 D1.1 D2.1 DD1.8 DD1.23 DD1.35 DD1.47 DD2.1 DD2.9 DD3.2 DD4.1 DD4.2 DD4.10 HL1.2 HL2.2 HL3.2 R7.1 R8.1 R15.1 XP1.3 XP2.3 XP3.2 XP4.2 | length 75.2
  Top Layer w0.2: v1(2.334,18.542) HL3.2 ; C6.1 v1(8.373,24.598) ; C5.1 v1(10.621,24.941) ; v1(11.51,12.876) 12.818,12.876 C7.1 16.411,11.771 16.722,12.082 DD1.8 ; v1(13.11,34.874) C21.1 13.11,31.166 13.62,30.656 14.431,30.656 DD3.2@14.231,30.856 ; v1(13.669,25.322) D2.1 ; HL2.2 v1(14.372,43.872) ; DD1.47 20.656,18.226 21.2,18.77 C3.1 21.251,18.896 21.162,18.985 v1(21.162,20.75) ; v1(22.256,4.494) C4.2 C4.2@24.337,4.257 ; D1.1@24.922,24.505 24.906,24.489 25.739,24.489 XP2.3 ; C1.1 25.226,7.072 25.156,7.142 DD1.23 ; DD1.35 C2.1@29.332,15.082 ; C2.1@29.332,15.209 C2.1@29.417,15.124 ; C2.1 30.598,16.559 v1(30.941,16.559) ; R8.1 v1(41.656,5.08) ; R7.1 v1(42.672,21.336) ; v1(50.202,65.157) HL1.2
  Top Layer w0.3: v1(4.26,31.81) C18.1 ; C29.1 18.838,40.727 18.838,43.937 19.13,44.229 DD4.1 v1(19.13,47.293) ; DD4.2 v1(20.4,48.563) ; C24.2 23.876,42.038 24.675,41.24 C25.2 24.853,40.386 v1(26.67,40.386) ; C4.2@24.481,4.625 24.481,5.465 24.934,5.918 C1.1 ; DD4.10 v1(30.56,47.166) ; R15.1 38.815,42.467 39.069,42.213 v1(40.466,42.213) ; v1(41.736,39.8) 42.079,39.457 C17.1 ; DD2.1@46.943,47.023 DD2.1 46.806,49.456 47.108,49.758 C12.1 C12.1@46.943,49.668
  other v1: 17.352,34.974 17.352,36.625 31.576,37.768
  other v2: 51.134,43.229 51.134,44.753 51.134,46.277 50.499,51.103 50.499,52.627 50.499,54.151 50.499,55.929 50.499,57.453 50.499,58.977
pads on no net: DD1.1 DD1.2 DD1.10 DD1.11 DD1.13 DD1.14 DD1.15 DD1.16 DD1.17 DD1.18 DD1.19 DD1.21 DD1.22 DD1.25 DD1.26 DD1.27 DD1.28 DD1.29 DD1.30 DD1.31 DD1.38 DD1.42 DD1.43 DD1.45 DD1.46 DD4.6 DD4.8 DD4.9 DD4.17

## Polygon pours and split planes (outlines as drawn)
"Общ. Внеш." on Int1 (GND) "Общ._Внеш._L02_P002" (solid, remove dead copper, pour order 2): 15.447,1 1,1 1,69 54,69 54,1 35.259,1 35.259,65.327 15.447,65.327 15.447,59 17.955,59 17.955,49.629 15.447,49.629
"Общ. Внеш." on Int1 (GND) "Общ._Внеш._L02_P028" (solid, remove dead copper, pour order 28): 35.259,1 15.447,1 15.447,49.629 35.259,49.629
"Общ. CAN" on Int1 (GND) "Общ._CAN_L02_P000" (solid, remove dead copper, pour order 0): 15.415,59 18,59 18,49.833 35.259,49.833 35.259,65.327 15.415,65.327
+5В on Int2 (PWR) "+5В_L03_P007" (solid, remove dead copper, pour order 7): 40.72,22.909 34.116,22.909 34.116,23.671 12.907,23.671 12.907,50.341 34.243,50.341 34.243,45.388 40.72,45.388
+24В on Int2 (PWR) "+24В_L03_P005" (solid, remove dead copper, pour order 5): 54,69 54,45.388 34.243,45.388 34.243,50.341 1,50.341 1,69
+3,3МК on Int2 (PWR) "+3,3МК_L03_P009" (solid, remove dead copper, pour order 9): 1,50.341 1,1 54,1 54,22.909 34.116,22.909 34.116,26.465 12.907,26.465 12.907,50.341
NetC9_1 on Int2 (PWR) "NETC9_1_L03_P006" (solid, remove dead copper, pour order 6): 40.72,45.388 54,45.388 54,22.909 40.72,22.909
+5В on Top Layer "+5В_L01_P022" (solid, remove dead copper, pour order 22): 42.244,37.006 41.101,37.006 41.101,38.53 33.735,38.53 33.735,32.688 33.735,33.958 18.114,33.958 18.114,31.037 17.987,31.164 15.955,31.163 15.955,23.671 22.178,23.671 22.178,30.275 30.687,30.275 30.687,23.417 31.068,23.036 42.244,23.036
+3,3МК on Top Layer "+3,3МК_L01_P023" (solid, remove dead copper, pour order 23): 13.288,30.402 13.288,26.465 1.064,26.465 1.064,30.402 2.112,30.402
"Общ. Внеш." on Top Layer "Общ._Внеш._L01_P027" (solid, remove dead copper, pour order 27): 18.114,31.314 18.114,33.958 16.209,33.958 16.209,31.314
+5В on Top Layer "+5В_L01_P026" (solid, remove dead copper, pour order 26): 37.795,41.733 35.001,41.733 35.001,45.67 37.795,45.67
"Общ. Внеш." on Top Layer "Общ._Внеш._L01_P025" (solid, remove dead copper, pour order 25): 33.735,33.958 16.209,33.958 16.209,38.657 33.735,38.657
NetC9_1 on Top Layer "NETC9_1_L01_P021" (solid, remove dead copper, pour order 21): 46.181,42.086 46.181,37.006 42.244,37.006 42.244,23.036 52.912,23.036 52.912,42.086
"Общ. Внеш." on Top Layer "Общ._Внеш._L01_P019" (solid, remove dead copper, pour order 19): 46.435,45.769 46.435,42.34 52.912,42.34 52.912,49.5 46.943,49.5 46.943,45.769
+24В on Top Layer "+24В_L01_P017" (solid, remove dead copper, pour order 17): 46.054,51.23 46.054,45.642 43.641,45.642 43.641,51.23
+24В on Top Layer "+24В_L01_P011" (solid, remove dead copper, pour order 11): 46.816,51.23 46.816,65.835 35.386,65.835 35.386,59.104 42.244,59.104 42.244,51.23
"Общ. Внеш." on Top Layer "Общ._Внеш._L01_P016" (solid, remove dead copper, pour order 16): 47.451,55.294 47.451,51.738 47.451,48.817 52.912,48.817 52.912,55.294
"Общ. Внеш." on Top Layer "Общ._Внеш._L01_P015" (solid, remove dead copper, pour order 15): 47.451,59.866 47.451,55.294 52.912,55.294 52.912,59.866
no net on Top Layer "NONET_L01_P013" (solid, remove dead copper, pour order 13): 46.816,65.835 52.912,65.835
no net on Top Layer "NONET_L01_P012" (solid, remove dead copper, pour order 12): 46.816,65.835 52.912,65.835
"Общ. Внеш." on Bottom Layer "Общ._Внеш._L04_P031" (solid, remove dead copper, pour order 31): 35.259,69.01 35.132,68.883 35.132,23.114 52.785,23.114 52.785,69.01

## Silkscreen, mask and mechanical layers (free items; w line width, h text height)
Top Overlay:
  lines w0.25: 4.826,49.784 8.763,49.784
  lines w0.254: 4.825,67.95 4.826,36.624 ; 1.524,36.624 1.524,67.95 8.825,67.95 8.825,44.95 8.825,36.624 1.524,36.624
  text "24V" at 47.832,62.533 h1.52
  text "Board ID" at 7.874,51.356 h1.52 r90
  text "5V" at 10.754,43.754 h1.52
  text "Rev. 1B" at 7.775,37.925 h1.52 r90
  text "ARS LED Strip Module" at 3.81,37.592 h1.52 r90
  text "3.3V" at 1.572,13.97 h1.52
Bottom Overlay:
  text "GND" at 23.575,45.134 h1
  text "CANH" at 28.655,45.134 h1
  text "GND" at 48.467,44.88 h1
  text "CANH" at 53.547,44.88 h1
  text "+24" at 25.734,43.483 h1
  text "CAN OUT" at 34.036,43.285 h1.52 r315
  text "+24" at 50.626,43.229 h1
  text "CAN IN" at 8.938,43.031 h1.52 r315
  text "CANL" at 29.417,41.578 h1
  text "CANL" at 54.309,41.324 h1
  text "GND / CAN" at 22.432,40.816 h1
  text "GND / CAN" at 47.324,40.562 h1
  text "DIN" at 37.846,24.892 h1
  text "5V" at 41.148,24.892 h1
  text "GND" at 40.132,23.114 h1
  text "LED INPUT" at 23.622,17.885 h1.52 r315
Board (Mech11):
  the board outline again, w0.254

## Dimensions
0,0 to 0,70 on Mechanical 1
0,0 to 55,0 on Mechanical 1